# Altium PCB DataCollectionV1.0（18-7-31）.PcbDoc (part 2 of 2)
Units mm, origin at the board's own origin, x right, y up, seen from the top; angles counter-clockwise.
Board outline 100 x 91.53 mm, 4 copper layers (Top Layer, GND, VCC, Bottom Layer); 127 components, 107 nets, 701 pads, 38 vias.
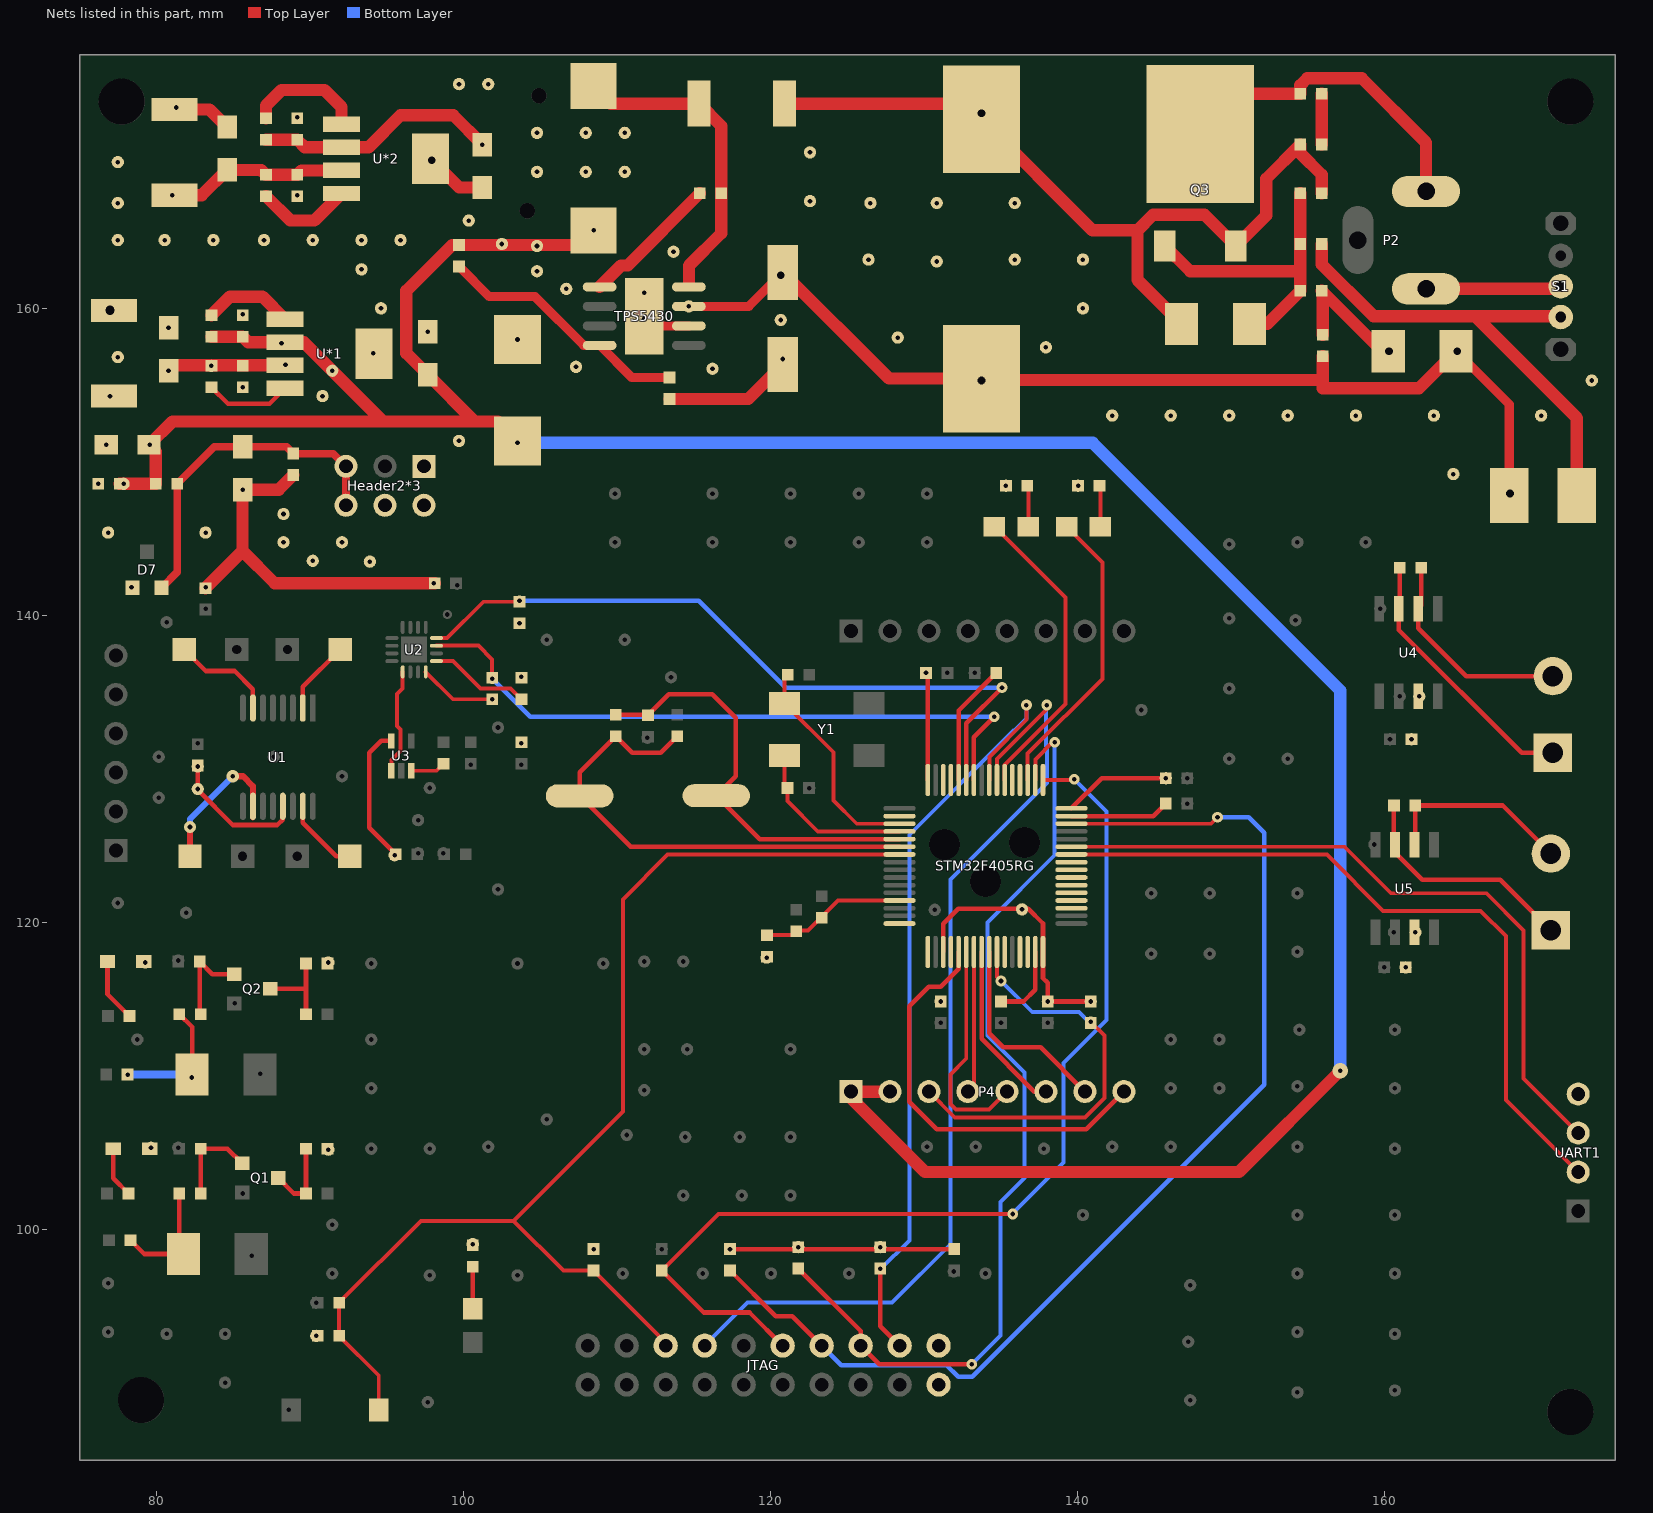
[diagram p4: the nets of this part, all layers, seen from the top]

## Via types
v1: diameter 0.7, hole 0.3, Top Layer to Bottom Layer, 23 vias
v2: diameter 0.8, hole 0.3, Top Layer to Bottom Layer, 13 vias
v3: diameter 1, hole 0.3, Top Layer to Bottom Layer, 2 vias

## Nets (pads, with @x,y where several pads share a name; then routed paths per layer and width w, separated by ;. In a path a pad name is that pad's centre, name@x,y a point inside that pad or via, vN(x,y) a via of type N, cw(c..) or ccw(c..) an arc to the next point about the centre after c; other vN are vias at no path point) (continued)
GND: C6.2 C8.2 C9.1 C10.2 C12.2 C13.2 C14.2 C15.2 C17.2 C18.2 C19.2 C20.2 C21.2 C22.2 C23.2 C24.2 C25.2 D5.1 D6.1 D7.1 D8.1 D9.1 D10.1 pad.2@76.2,148.59 pad.2@76.708,151.13 pad.2@76.835,145.415 pad.2@76.962,159.893 pad.2@77.47,156.845 pad.2@77.47,164.465 pad.2@77.47,166.878 pad.2@77.47,169.545 pad.2@78.359,141.859 pad.2@80.518,164.465 pad.2@80.772,158.75 pad.2@81.28,173.101 pad.2@83.185,141.859 pad.2@83.185,145.415 pad.2@83.693,164.465 pad.2@85.598,148.209 pad.2@85.598,154.876 pad.2@85.598,159.639 pad.2@86.995,164.465 pad.2@88.265,144.78 pad.2@89.154,167.386 pad.2@89.154,172.466 pad.2@90.17,164.465 pad.2@90.805,154.305 pad.2@92.075,144.78 pad.2@93.345,162.56 pad.2@93.345,164.465 pad.2@94.107,157.099 pad.2@94.615,160.02 pad.2@95.885,164.465 pad.2@97.663,158.496 pad.2@97.917,169.672 pad.2@98.044,142.113 pad.2@99.695,151.384 pad.2@100.33,165.735 pad.2@103.505,157.988 pad.2@104.775,162.433 pad.2@106.68,161.29 pad.2@107.315,156.21 pad.2@111.76,159.385 pad.2@111.76,161.036 pad.2@113.665,163.703 pad.2@116.205,156.083 pad.2@120.65,159.258 pad.2@120.777,156.718 pad.2@122.555,167.005 pad.2@122.555,170.18 pad.2@126.365,163.195 pad.2@126.492,166.878 pad.2@128.27,158.115 pad.2@130.81,163.068 pad.2@130.81,166.878 pad.2@133.731,172.72 pad.2@135.89,163.195 pad.2@135.89,166.878 pad.2@137.922,157.48 pad.2@140.335,160.02 pad.2@140.335,163.195 pad.2@142.24,153.035 pad.2@146.05,153.035 pad.2@149.86,153.035 pad.2@153.67,153.035 pad.2@158.115,153.035 pad.2@160.274,157.226 pad.2@163.195,153.035 pad.2@164.465,149.225 pad.2@170.18,153.035 pad.2@173.482,155.321 Q3.2 R3.1 R24.2 R26.1 R28.1 R39.1 TPS5430.6 TPS5430.9 U*1.5 U*2.5 | length 105.3
  Top Layer w0.6: TPS5430.9@112.395,158.877 TPS5430.6@114.668,158.877
  Top Layer w0.8: D9.1@81.153,172.974 83.439,172.974 C23.2@84.582,171.831 ; R3.1@83.185,141.796 85.598,144.208 ; C14.2@88.9,149.161 87.947,148.209 C12.2@85.598,148.209 85.598,144.208 ; U*2.5@97.844,169.755 99.705,167.894 C22.2@101.219,167.894 ; R39.1@98.108,142.113 87.694,142.113 85.598,144.208 ; R28.1@113.411,154.114 118.538,154.114 C8.2@120.786,156.362 ; D8.1@120.904,173.355 132.706,173.355 C6.2@133.722,172.339 140.961,165.1 143.891,165.1 ; D6.1@146.761,159.004 143.891,161.874 143.891,165.1 ; C10.2@155.892,161.163 C10.2@155.956,161.1 ; R24.2@155.892,167.513 155.892,168.719 154.495,170.117 R26.1@154.495,170.688 152.273,168.465 152.273,166.065 Q3.2@150.292,164.084 148.26,166.116 144.907,166.116 143.891,165.1 ; C9.1@155.956,158.305 C10.2@155.956,161.1 ; D5.1@160.223,157.226 159.83,157.226 C10.2@155.956,161.1
JTCK: JTAG.9 R43.1 STM32F405RG.49 | length 68.2
  Top Layer w0.256: R43.1@112.903,97.346 116.586,101.028 v1(135.763,101.028) ; STM32F405RG.49@137.735,129.298 v1@139.839,129.298
  Top Layer w0.3: R43.1@112.903,97.346 115.633,94.615 118.618,94.615 JTAG.9@120.777,92.456
  Bottom Layer w0.256: v1@135.636,100.965 139.065,104.394 139.065,110.871 141.859,113.665 141.859,127.254 v1(139.763,129.35)
JTDI: JTAG.5 R36.2 STM32F405RG.50 | length 62.2
  Top Layer w0.256: STM32F405RG.50@137.235,129.298 137.235,130.631 v1@138.43,131.826
  Top Layer w0.3: R36.2@121.793,97.472 125.857,93.408 JTAG.5@125.857,92.456 127.063,91.249 v1(133.096,91.249)
  Bottom Layer w0.256: v1(133.096,91.249) 134.969,93.123 134.969,101.822 136.525,103.378 136.525,110.236 134.112,112.649 134.112,120.015 138.493,124.396 v1(138.493,131.762)
JTDO: JTAG.13 STM32F405RG.55 | length 62.7
  Top Layer w0.256: STM32F405RG.55@134.735,129.298 134.735,130.671 137.922,133.858 v1@137.922,134.175
  Bottom Layer w0.256: JTAG.13@115.697,92.456 118.491,95.25 127.889,95.25 131.699,99.06 131.699,122.809 137.986,129.095 137.986,131.453 137.915,131.523 137.915,134.105 v1(137.986,134.175)
JTMS: JTAG.7 R37.2 STM32F405RG.46 | length 75.1
  Top Layer w0.256: STM32F405RG.46@139.585,126.448 148.673,126.448 v1(149.098,126.873)
  Top Layer w0.3: R37.2@117.348,97.346 120.332,94.361 121.412,94.361 JTAG.7@123.317,92.456
  Bottom Layer w0.3: JTAG.7@123.317,92.456 124.587,91.186 131.445,91.186 132.207,90.424 133.119,90.424 152.146,109.451 152.146,125.857 151.13,126.873 v1(149.098,126.873)
JTRST: JTAG.3 R34.2 STM32F405RG.56 | length 52.2
  Top Layer w0.256: STM32F405RG.56@134.235,129.298 134.235,130.806 136.652,133.223 v1(136.652,134.175)
  Top Layer w0.3: v1(127.127,97.472) 127.127,93.726 JTAG.3@128.397,92.456
  Bottom Layer w0.256: v1@127.127,97.409 129.032,99.314 129.032,125.73 135.82,132.518 135.875,132.518 136.652,133.295 v1(136.652,134.175)
MUXOUT: U2.13 U3.1 | length 6.9
  Top Layer w0.256: U3.1@95.29,129.902 95.29,130.596 95.885,131.191 95.885,132.588 95.656,132.817 95.656,134.894 96.024,135.262 U2.13@96.024,136.345
NetC10_1: C10.1 D6.2 Q3.1 R23.1 R24.1 | length 20.1
  Top Layer w0.8: Q3.1@145.669,164.084 147.32,162.433 154.495,162.433 ; D6.2@151.181,159.004 152.336,159.004 C10.1@154.495,161.163 154.495,162.433 ; R24.1@154.495,167.513 R23.1@154.495,164.211 154.495,162.433
NetC11_1: C11.1 R26.2 | length 3.3
  Top Layer w0.8: R26.2@155.892,170.688 C11.1@155.892,173.99
NetC11_2: C11.2 P2.2 Q3.3 | length 17.8
  Top Layer w0.8: Q3.3@150.575,173.99 C11.2@154.495,173.99 154.495,174.556 154.946,175.006 158.496,175.006 162.687,170.815 P2.2@162.687,167.64
NetC16_1: C16.1 TPS5430.1 | length 9.1
  Top Layer w0.8: TPS5430.1@108.852,161.417 110.249,162.814 110.68,162.814 C16.1@115.379,167.513
NetC16_2: C16.2 D8.2 L1.1 TPS5430.8 | length 20.6
  Top Layer w0.8: L1.1@108.458,174.498 109.601,173.355 D8.2@115.316,173.355 116.776,171.894 C16.2@116.776,167.513 116.776,164.909 114.668,162.801 TPS5430.8@114.668,161.544
NetC37_1: C37.1 STM32F405RG.47 | length 6.5
  Top Layer w0.3: STM32F405RG.47@139.585,126.948 144.919,126.948 C37.1@145.732,127.762
NetC38_2: C38.2 STM32F405RG.31 | length 5
  Top Layer w0.3: C38.2@135.001,114.871 136.462,114.871 137.235,115.645 STM32F405RG.31@137.235,118.098
NetCAN1_1: CAN1.1 R47.1 U4.7 | length 17.4
  Top Layer w0.3: R47.1@160.972,143.129 160.972,140.51 U4.7@160.909,140.447 160.909,139.065 168.91,131.064 CAN1.1@170.942,131.064
NetCAN1_2: CAN1.2 R47.2 U4.6 | length 14.1
  Top Layer w0.3: R47.2@162.369,143.129 162.369,140.637 U4.6@162.179,140.447 162.179,139.192 165.307,136.064 CAN1.2@170.942,136.064
NetCAN2_1: CAN2.1 R49.1 U5.7 | length 15.3
  Top Layer w0.3: R49.1@160.591,127.635 160.591,125.143 U5.7@160.655,125.08 160.655,124.587 162.433,122.809 167.513,122.809 CAN2.1@170.815,119.507
NetCAN2_2: CAN2.2 R49.2 U5.6 | length 12.7
  Top Layer w0.3: U5.6@161.925,125.08 161.988,125.143 R49.2@161.988,127.635 167.687,127.635 CAN2.2@170.815,124.507
NetD1_1: D1.1 R5.2 | length 3.3
  Top Layer w0.3: D1.1@77.179,105.283 77.179,103.352 R5.2@78.168,102.362
NetD2_2: D2.2 R9.2 R10.1 | length 7.9
  Top Layer w0.3: R9.2@78.295,99.314 79.184,98.425 D2.2@81.737,98.425 81.471,98.692 R10.1@81.471,102.362
NetD3_1: D3.1 R15.2 | length 4.1
  Top Layer w0.3: D3.1@76.798,117.475 76.798,115.353 R15.2@78.232,113.919
NetD4_2: D4.2 pad.1@82.296,109.918 R19.2 R20.1 | length 8.5
  Top Layer w0.3: R20.1@81.471,114.046 82.309,113.208 D4.2@82.309,110.109
  Bottom Layer w0.5: v2(78.105,110.109) pad.1@82.308,110.109
NetDS1_1: DS1.1 R33.1 | length 2.7
  Top Layer w0.256: R33.1@141.415,148.463 141.477,148.4 DS1.1@141.477,145.798
NetDS2_1: DS2.1 R40.1 | length 2.7
  Top Layer w0.256: R40.1@136.715,148.463 136.778,148.4 DS2.1@136.778,145.798
NetP2_1: P2.1 S1.2 | length 8.8
  Top Layer w0.8: P2.1@162.687,161.29 171.287,161.29 S1.2@171.45,161.453
NetP3_1: P3.1 R23.2 S1.1 | length 33
  Top Layer w0.8: R23.2@155.892,164.211 155.892,162.877 159.258,159.512 165.862,159.512 172.507,152.867 P3.1@172.507,147.828 ; 165.608,159.512 171.391,159.512 S1.1@171.45,159.453
NetPower_1: Power.1 R42.1 | length 2.7
  Top Layer w0.3: Power.1@100.582,94.868 100.582,97.598 R42.1@100.584,97.599
NetQ1_1: Q1.1 R10.2 R11.2 | length 6
  Top Layer w0.3: R10.2@82.867,102.362 R11.2@82.867,105.283 84.611,105.283 Q1.1@85.566,104.328
NetQ1_3: Q1.3 R4.1 R8.2 | length 5.2
  Top Layer w0.3: Q1.3@87.916,103.378 88.932,102.362 R8.2@89.725,102.362 R4.1@89.725,105.283
NetQ2_1: Q2.1 R20.2 R21.2 | length 6.1
  Top Layer w0.3: R20.2@82.867,114.046 82.804,114.109 R21.2@82.804,117.475 83.632,116.647 Q2.1@85.058,116.647
NetQ2_3: Q2.3 R16.1 R17.2 | length 5.6
  Top Layer w0.3: Q2.3@87.408,115.697 89.725,115.697 ; R17.2@89.725,114.046 89.725,115.697 ; R16.1@89.725,117.348 89.725,115.697
NetR1_1: R1.1 U1.2 | length 4.8
  Top Layer w0.3: U1.2@89.52,133.985 89.52,135.367 R1.1@91.948,137.795
NetR2_2: R2.2 U1.15 | length 5
  Top Layer w0.3: U1.15@89.52,127.585 89.52,126.507 91.694,124.333 R2.2@92.583,124.333
NetR6_1: R6.1 U1.7 | length 6.8
  Top Layer w0.3: R6.1@81.788,137.795 83.185,136.398 85.09,136.398 86.27,135.218 U1.7@86.27,133.985
NetR7_2: R7.2 U1.10 | length 10
  Top Layer w0.3: U1.10@86.27,126.802 U1.10@86.27,127.585
  Top Layer w0.4: R7.2@82.169,124.333 v2(82.169,126.238) ; v2(84.963,129.54) 85.635,129.54 86.27,128.905 U1.10@86.27,127.585
  Bottom Layer w0.4: v2(82.169,126.238) 82.169,126.746 v2(84.963,129.54)
NetR12_2: R12.2 U2.1 | length 6.6
  Top Layer w0.256: U2.1@98.224,137.045 99.314,137.045 101.104,135.255 103.06,135.255 R12.2@103.759,134.556
NetR22_2: R22.2 U3.3 | length 2.3
  Top Layer w0.256: U3.3@96.59,129.902 98.215,129.902 R22.2@98.679,130.365
NetR27_1: R27.1 R28.2 TPS5430.4 | length 16.7
  Top Layer w0.6: R27.1@99.695,162.75 101.663,160.782 104.648,160.782 107.823,157.607 TPS5430.4@108.852,157.607 110.947,155.511 R28.2@113.411,155.511
NetR29_1: R29.1 U*1.1 | length 5.9
  Top Layer w0.8: R29.1@83.566,159.576 84.772,160.782 86.884,160.782 U*1.1@88.361,159.305
NetR30_1: R30.1 U*1.4 | length 5.7
  Top Layer w0.3: R30.1@83.566,154.876 84.645,153.797 87.353,153.797 U*1.4@88.361,154.805
NetR31_1: R31.1 U*2.1 | length 7.8
  Top Layer w0.8: R31.1@87.122,172.403 87.122,173.228 88.138,174.244 90.932,174.244 92.044,173.132 U*2.1@92.044,172.005
NetR32_1: R32.1 U*2.4 | length 6.3
  Top Layer w0.8: R32.1@87.122,167.322 88.709,165.735 90.274,165.735 U*2.4@92.044,167.505
NetR38_1: R38.1 STM32F405RG.60 | length 8
  Top Layer w0.3: STM32F405RG.60@132.235,129.298 132.235,133.823 R38.1@134.683,136.271
PA2: STM32F405RG.16
PA3: STM32F405RG.17
PA4: STM32F405RG.20
PA8: STM32F405RG.41
PB1: STM32F405RG.27
PB8: STM32F405RG.61
PB9: STM32F405RG.62
PB10: STM32F405RG.29
PB11: STM32F405RG.30
PB14: STM32F405RG.35
PB15: STM32F405RG.36
PC6: STM32F405RG.37
PC7: STM32F405RG.38
PC8: STM32F405RG.39
PC9: STM32F405RG.40
PC10: DS1.2 STM32F405RG.51 | length 19.5
  Top Layer w0.256: STM32F405RG.51@136.735,129.298 136.735,131.02 141.605,135.89 141.605,143.46 DS1.2@139.267,145.798
PC11: STM32F405RG.52
PC12: STM32F405RG.53
PC13: STM32F405RG.2
PC14: C29.2 STM32F405RG.3 Y1.4 | length 14.5
  Top Layer w0.256: C29.2@121.102,136.144 120.898,135.94 Y1.4@120.898,134.288 124.079,131.107 124.079,127.972 125.603,126.448 STM32F405RG.3@128.385,126.448
PC15: C30.2 STM32F405RG.4 Y1.1 | length 11.2
  Top Layer w0.256: Y1.1@120.898,130.888 120.898,128.974 C30.2@121.094,128.778 121.094,127.917 123.063,125.948 STM32F405RG.4@128.385,125.948
PD2: DS2.2 STM32F405RG.54 | length 20.1
  Top Layer w0.256: DS2.2@134.568,145.798 139.192,141.174 139.192,134.239 135.235,130.282 STM32F405RG.54@135.235,129.298
PH0: C31.2 R44.1 STM32F405RG.5 Y2.1 | length 27.7
  Top Layer w0.3: R44.1@109.9,133.541 111.972,133.541 C31.2@112,133.513 113.361,134.874 116.2,134.874 117.729,133.345 117.729,129.553 Y2.1@116.45,128.274 119.276,125.448 STM32F405RG.5@128.385,125.448
PH1: C32.2 R44.2 STM32F405RG.6 Y2.2 | length 32
  Top Layer w0.3: C32.2@113.919,132.143 112.84,131.064 110.98,131.064 R44.2@109.9,132.143 107.55,129.793 Y2.2@107.55,128.266 110.868,124.948 STM32F405RG.6@128.385,124.948
RESET: C27.1 JTAG.15 R35.1 R41.2 RESET.1 STM32F405RG.7 | length 78.1
  Top Layer w0.256: RESET.1@94.467,88.265 94.467,90.509 R35.1@91.885,93.091 C27.1@91.885,95.25 97.218,100.584 103.251,100.584 ; JTAG.15@113.157,92.647 R41.2@108.458,97.346 106.489,97.346 103.251,100.584 ; STM32F405RG.7@128.385,124.448 113.284,124.448 110.363,121.527 110.363,107.696 103.251,100.584
  Top Layer w0.8: JTAG.15@113.157,92.456 JTAG.15@113.157,92.647
RESET_N: P4.3 R48.1 STM32F405RG.26 | length 27
  Top Layer w0.256: P4.3@130.302,109 131.987,107.315 140.462,107.315 141.732,108.585 141.732,112.649 v1(140.843,113.538) ; STM32F405RG.26@134.735,118.098 134.735,116.459 v1@134.989,116.205
  Bottom Layer w0.256: v1(135.001,116.205) 137.033,114.173 140.081,114.173 v1@140.843,113.411
RX: STM32F405RG.43 UART1.3 | length 46.4
  Top Layer w0.256: STM32F405RG.43@139.585,124.948 157.373,124.948 160.401,121.92 166.624,121.92 169.037,119.507 169.037,109.855 UART1.3@172.593,106.299
SCL: R13.2 STM32F405RG.58 U2.3 | length 43.6
  Top Layer w0.256: U2.3@98.224,138.045 100.969,138.045 101.854,137.16 R13.2@101.854,135.953
  Top Layer w0.3: STM32F405RG.58@133.235,129.298 133.235,132.092 v1(134.556,133.413)
  Bottom Layer w0.3: v1(101.854,135.89) 104.331,133.413 v1(134.556,133.413)
SDA: R14.1 STM32F405RG.59 U2.4 | length 47.1
  Top Layer w0.256: U2.4@98.224,138.545 98.921,138.545 101.282,140.906 R14.1@103.632,140.906
  Top Layer w0.3: STM32F405RG.59@132.735,129.298 132.735,132.989 v1(135.064,135.319)
  Bottom Layer w0.3: v1(103.632,140.97) 115.316,140.97 120.968,135.319 v1(135.064,135.319)
SPI_CLK: P4.8 STM32F405RG.21 | length 27.3
  Top Layer w0.3: STM32F405RG.21@132.235,118.098 132.235,116.995 131.064,115.824 130.302,115.824 129.032,114.554 129.032,108.331 130.81,106.553 140.555,106.553 P4.8@143.002,109
SPI_CS: P4.7 STM32F405RG.25 | length 13.1
  Top Layer w0.3: STM32F405RG.25@134.235,118.098 134.235,112.803 135.151,111.887 137.575,111.887 P4.7@140.462,109
SPI_INTR: P4.6 STM32F405RG.24 | length 11.3
  Top Layer w0.3: STM32F405RG.24@133.735,118.098 133.735,112.435 137.17,109 P4.6@137.922,109
SPI_MISO: P4.5 STM32F405RG.22 | length 14.7
  Top Layer w0.256: STM32F405RG.22@132.735,118.098 132.735,111.145 131.699,110.109 131.699,108.204 132.08,107.823 134.205,107.823 P4.5@135.382,109
SPI_MOSI: P4.4 STM32F405RG.23 | length 9.3
  Top Layer w0.254: P4.4@132.842,109 133.235,109.393 STM32F405RG.23@133.235,118.098
TX: STM32F405RG.42 UART1.2 | length 47.8
  Top Layer w0.256: STM32F405RG.42@139.585,124.448 156.222,124.448 159.893,120.777 166.243,120.777 167.894,119.126 167.894,108.458 UART1.2@172.593,103.759
VCC3V3: C3.1 C23.1 C25.1 C26.1 C28.2 C35.1 C36.1 C39.2 C40.2 C41.2 D1.2 D3.2 D9.2 JTAG.1 JTAG.2 pad.1@79.248,117.411 pad.1@79.629,105.346 pad.1@91.186,105.219 pad.1@91.186,117.411 pad.1@108.458,98.742 pad.1@117.348,98.742 pad.1@121.793,98.87 pad.1@127.127,98.87 pad.2@81.026,167.386 pad.2@101.854,134.556 pad.2@103.632,139.51 pad.2@103.759,131.699 pad.2@103.759,136.017 pad.5@90.392,93.091 pad.5@119.729,117.729 pad.6@130.112,136.271 pad.6@135.319,148.463 pad.6@140.017,148.463 pad.6@145.732,129.413 pad.6@161.353,117.094 pad.6@161.734,131.953 pad.6@161.988,119.38 pad.6@162.243,134.747 pad.8@131.064,114.871 pad.8@136.368,120.87 pad.8@138.049,114.871 pad.8@140.843,114.871 R4.2 R12.1 R13.1 R14.2 R16.2 R32.2 R33.2 R34.1 R35.2 R36.1 R37.1 R40.2 R41.1 R42.2 R45.1 R48.2 STM32F405RG.19 STM32F405RG.32 STM32F405RG.48 STM32F405RG.64 U2.16 U4.3 U5.3 U*2.3 UART1.4 | length 62.7
  Top Layer w0.256: U2.16@97.524,136.345 99.312,134.556 R13.1@101.854,134.556
  Top Layer w0.3: R37.1@117.348,98.742 C26.1@131.953,98.742 ; C28.2@130.112,136.271 130.235,136.148 STM32F405RG.64@130.235,129.298 ; STM32F405RG.19@131.235,118.098 131.235,119.932 132.207,120.904 136.779,120.904 137.735,119.948 STM32F405RG.32@137.735,118.098 137.735,116.392 138.049,116.078 C39.2@138.049,114.871 R48.2@140.843,114.871 ; STM32F405RG.48@139.585,127.448 141.55,129.413 C35.1@145.732,129.413
  Top Layer w0.8: pad.2@81.026,167.386 D9.2@81.153,167.386 82.931,167.386 C23.1@84.582,169.037 86.804,169.037 R32.2@87.122,168.719 C25.1@89.154,168.719 89.44,169.005 U*2.3@92.044,169.005
  other v2: 100.584,99.06
VCC5V: C4.2 C19.1 C21.1 D10.2 Header2*3.1 Header2*3.2 pad.1@95.504,124.396 pad.2@76.962,154.305 pad.2@80.772,155.956 pad.2@83.566,156.273 pad.2@88.392,156.337 R30.2 U3.5 U*1.3 | length 16.8
  Top Layer w0.254: C19.1@80.772,155.956 C19.1@81.121,156.305
  Top Layer w0.3: U3.5@95.29,131.842 94.631,131.842 93.853,131.064 93.853,126.174 C4.2@95.567,124.46
  Top Layer w0.8: C19.1@81.121,156.305 U*1.3@88.361,156.305
VCC7V: C13.1 C15.1 C17.1 C18.1 C20.1 C22.1 C24.1 L1.2 P4.1 P4.2 pad.2@99.695,174.625 pad.2@101.6,174.625 pad.2@101.219,170.688 pad.2@102.489,164.211 pad.2@104.775,164.084 pad.2@104.775,168.91 pad.2@104.775,171.45 pad.2@107.95,168.91 pad.2@107.95,171.45 pad.2@108.458,165.1 pad.2@110.49,168.91 pad.2@110.49,171.45 pad.3 R25.2 R27.2 R29.2 R31.2 U*1.2 U*2.2 | length 208.6
  Top Layer w0.8: C15.1@77.597,148.59 R25.2@79.947,148.59 79.947,150.685 C13.1@79.502,151.13 81.026,152.654 94.742,152.654 ; R29.2@83.566,158.178 C20.1@85.598,158.178 85.971,157.805 U*1.2@88.361,157.805 89.591,157.805 94.742,152.654 ; R31.2@87.122,171.005 C24.1@89.154,171.005 89.654,170.505 U*2.2@92.044,170.505 93.797,170.505 95.885,172.593 99.314,172.593 C22.1@101.219,170.688 ; C17.1@103.505,151.384 102.235,152.654 100.711,152.654 ; L1.2@108.458,165.1 107.505,164.147 R27.2@99.695,164.147 99.251,164.147 96.266,161.163 96.266,157.099 C18.1@97.663,155.702 100.711,152.654 ; P4.2@127.762,109 P4.1@125.222,109 125.222,108.585 130.048,103.759 150.495,103.759 v3(157.099,110.363) ; 94.742,152.654 100.711,152.654
  Bottom Layer w0.8: v3@103.378,151.257 140.97,151.257 157.099,135.128 v3(157.099,110.363)
  other v3: 103.505,151.257
VCC24V: C6.1 C8.1 C9.2 D5.2 P3.2 pad.0@114.668,160.147 pad.0@120.65,162.179 pad.2@133.731,155.321 pad.2@164.719,157.226 pad.2@168.148,147.955 TPS5430.7 | length 67.8
  Top Layer w0.6: TPS5430.7@114.707,160.108 TPS5430.7@114.668,160.147 118.571,160.147 C8.1@120.786,162.362 ; D5.2@164.643,157.226 168.107,153.762 P3.2@168.107,147.828
  Top Layer w0.8: C8.1@120.786,162.362 127.7,155.448 C6.1@133.722,155.448 133.816,155.354 155.956,155.354 ; C9.2@155.956,156.909 155.956,154.813 162.23,154.813 D5.2@164.643,157.226
VDD_ADG711: C1.2 Header2*3.4 pad.1@82.677,128.714 pad.1@82.677,130.175 pad.1@88.265,146.621 pad.1@90.17,143.573 pad.1@93.888,143.52 U1.13 | length 9.1
  Top Layer w0.3: C1.2@82.677,130.238 82.677,128.651 84.963,126.365 87.865,126.365 88.22,126.72 U1.13@88.22,127.585
VDDA: C33.1 C34.1 R45.2 STM32F405RG.13 | length 9.6
  Top Layer w0.256: R45.2@119.761,119.189 121.349,119.189 121.666,119.507 122.428,119.507 124.369,121.448 STM32F405RG.13@128.385,121.448
VREF5V: C12.1 C14.1 D7.2 Header2*3.5 Header2*3.6 R25.1 | length 22.2
  Top Layer w0.5: D7.2@80.325,141.827 81.343,142.845 R25.1@81.343,148.59 83.757,151.003 C12.1@85.598,151.003 88.456,151.003 C14.1@88.9,150.558 91.504,150.558 Header2*3.5@92.329,149.733 Header2*3.6@92.329,147.193
pads on no net: D7.3 JTAG.11 JTAG.17 JTAG.19 P1.3 P1.4 P1.5 P1.6 P1.7 P1.8 P2.3 S1.3 S1.4 S1.5 STM32F405RG.1 TPS5430.2 TPS5430.3 TPS5430.5 U1.4 U1.12 U2.7 U2.17 U4.5 U5.5 Y1.2 Y1.3

## Polygon pours and split planes (outlines as drawn)
GND on Bottom Layer "Top Overlay-No Net" (hatched 90Degree grid 0.7 track 0.3, remove dead copper, pour order 41): 71.12,153.797 73.533,151.384 100.345,151.384 100.345,140.52 98.425,138.6 97.366,137.541 66.167,137.541
DGND on Bottom Layer "Top Overlay-No Net" (hatched 90Degree grid 0.7 track 0.3, remove dead copper, pour order 39): 68.453,141.351 98.171,141.351 99.06,140.462 98.806,140.716 98.806,148.209 173.736,148.209 176.657,145.288 178.689,143.256 178.689,79.502 59.182,79.502 56.515,82.169
GND on Bottom Layer "Top Overlay-No Net" (hatched 90Degree grid 0.7 track 0.3, remove dead copper, pour order 37): 75.057,163.703 143.383,163.703 164.973,142.113 165.862,141.224 174.879,141.224 174.879,176.276 174.244,176.911 69.977,176.911
AGND on Bottom Layer "Top Overlay-No Net" (hatched 90Degree grid 0.7 track 0.3, remove dead copper, pour order 35): 75,140.589 75.127,140.716 96.6,140.716 96.6,138.074 96.774,137.9 96.774,137.686 97.3,137.16 97.3,135.89 97.3,135.745 102.108,130.937 102.108,124.079 100.076,122.047 81.915,122.047 81.915,122.174 80.518,123.571 80.518,126.238 77.978,128.778 75.184,128.778
VCC7V on Bottom Layer "Top Overlay-No Net" (hatched 90Degree grid 0.7 track 0.3, remove dead copper, pour order 33): 74.93,166.243 141.351,166.243 167.132,140.462 168.021,139.573 168.021,93.853 120.523,93.853 119.253,95.123 120.904,96.774 120.904,144.399 103.632,144.399 100.203,147.828 100.076,147.955 100.076,151.257 75.565,151.257 74.803,152.019
AVDD_ADC on Bottom Layer "Top Overlay-No Net" (hatched 90Degree grid 0.7 track 0.3, remove dead copper, pour order 23): 91.059,151.003 91.059,145.923 93.853,145.923 93.98,145.796 93.98,134.747 93.98,134.493 96.901,131.572 101.473,131.572 101.473,134.62 99.187,136.906 98.679,137.414 98.679,151.003 91.059,151.003 90.932,151.13
GND on Top Layer "Top Overlay-No Net" (hatched 90Degree grid 0.7 track 0.3, remove dead copper, pour order 29): 75,141.732 98.298,141.732 98.298,150.495 160.02,150.495 167.767,142.748 167.767,142.621 175.006,142.621 175.133,142.748 174.879,143.002 174.879,176.657 74.803,176.657
VCC24V on Top Layer "Top Overlay-No Net" (hatched 90Degree grid 0.7 track 0.3, remove dead copper, pour order 30): 110.998,165.608 110.998,152.273 111.252,152.019 162.179,152.019 162.179,147.828 165.862,144.145 169.909,144.145 170.173,144.41 170.879,145.115 170.879,145.333 170.879,154.737 170.933,154.792 167.005,158.72 167.005,159.004 128.524,159.004 128.27,159.258 123.063,164.465 123.063,165.354
NetC11_2 on Top Layer "Top Overlay-No Net" (hatched 90Degree grid 0.7 track 0.3, remove dead copper, pour order 25): 143.5,175.895 143.51,175.89 143.51,170.307 168.529,170.307 168.7,170.396 168.7,175.829
NetP2_1 on Top Layer "Top Overlay-No Net" (hatched 90Degree grid 0.7 track 0.3, remove dead copper, pour order 22): 158.242,164.465 174.244,164.465 174.371,164.338 174.371,159.131 158.369,159.131 158.115,159.385
DGND on Top Layer "Top Overlay-No Net" (hatched 90Degree grid 0.7 track 0.3, remove dead copper, pour order 31): 75,127.762 75.127,127.635 77.851,127.635 77.851,127.381 79.502,125.73 79.502,123.063 81.915,120.65 100.584,120.65 100.584,120.777 103.886,124.079 103.378,124.587 103.378,131.064 102.108,132.334 101.727,132.715 100.33,132.715 97.282,135.763 97.282,137.033 96.52,137.795 96.52,140.716 98.679,140.716 98.806,140.843 98.806,149.86 159.512,149.86 167.386,141.986 175,141.986 175,85.211 174.752,84.963 75.057,84.963
AGND on Top Layer "Top Overlay-No Net" (hatched 90Degree grid 0.7 track 0.3, remove dead copper, pour order 27): 75,140.716 96.52,140.716 96.52,137.795 96.52,137.668 97.282,136.906 97.282,135.763 102.108,130.937 102.108,124.206 102.108,124.079 100.076,122.047 81.915,122.047 81.915,122.174 80.518,123.571 80.518,126.238 78.105,128.651 75.311,128.651
GND on GND (split plane): 174.49,142.786 167.762,142.786 167.76,142.798 167.732,142.84 159.985,150.587 159.943,150.615 159.893,150.624 98.806,150.624 98.756,150.615 98.714,150.587 98.686,150.545 98.677,150.495 98.677,141.226 75.51,141.226 75.51,176.02 174.49,176.02
AGND on GND (split plane): 96.391,138.303 96.4,138.253 96.428,138.211 97.153,137.487 97.153,135.763 97.162,135.713 97.19,135.671 101.979,130.883 101.979,124.006 100.149,122.176 82.096,122.176 80.647,123.625 80.647,126.238 80.638,126.288 80.61,126.33 78.197,128.743 78.155,128.771 78.105,128.78 75.51,128.78 75.51,140.968 96.391,140.968
DGND on GND (split plane): 167.457,142.748 167.429,142.706 167.419,142.656 167.429,142.607 167.457,142.565 167.499,142.537 167.548,142.527 174.49,142.527 174.49,85.51 75.51,85.51 75.51,128.522 78.051,128.522 80.389,126.184 80.389,123.571 80.398,123.521 80.426,123.479 81.95,121.955 81.992,121.927 82.042,121.918 100.203,121.918 100.253,121.927 100.295,121.955 102.2,123.86 102.228,123.902 102.237,123.952 102.237,130.937 102.228,130.987 102.2,131.029 97.411,135.817 97.411,137.541 97.402,137.591 97.374,137.633 96.649,138.357 96.649,140.968 98.806,140.968 98.856,140.977 98.898,141.005 98.926,141.047 98.935,141.097 98.935,150.366 159.839,150.366
VCC24V on VCC (split plane): 174.49,143.25 167.848,143.25 159.994,151.104 159.918,151.167 159.831,151.213 159.737,151.242 159.639,151.251 128.732,151.251 124.942,155.041 124.866,155.104 124.779,155.15 124.685,155.179 124.587,155.188 115.443,155.188 115.401,155.184 112.643,157.942 112.643,176.02 174.49,176.02
VCC7V on VCC (split plane): 111.639,157.734 111.648,157.636 111.677,157.542 111.723,157.455 111.786,157.379 114.077,155.088 103.29,155.088 98.192,160.186 98.192,176.02 111.639,176.02
VDD_ADG711 on VCC (split plane): 93.724,148.59 93.733,148.54 93.761,148.498 93.803,148.47 93.853,148.461 95.629,148.461 95.629,145.936 94.591,140.748 94.396,140.554 94.368,140.512 94.359,140.462 94.359,130.048 94.359,124.387 92.148,122.176 82.096,122.176 80.647,123.625 80.647,126.238 80.638,126.288 80.61,126.33 79.403,127.536 79.377,127.562 79.377,144.218 81.88,146.72 81.908,146.762 81.917,146.812 81.917,152.906 93.724,152.906
VCC5V on VCC (split plane): 98.55,152.473 98.55,146.739 98.206,146.396 98.178,146.354 98.169,146.304 98.169,143.183 96.428,141.443 96.4,141.401 96.391,141.351 96.391,139.827 96.391,138.176 96.4,138.126 96.428,138.084 97.153,137.36 97.153,135.763 97.153,132.896 96.177,131.92 96.149,131.878 96.139,131.828 96.089,131.819 96.047,131.791 96.019,131.749 96.01,131.699 96.01,123.244 92.529,119.763 75.51,119.763 75.51,163.066 87.957,163.066
VCC3V3 on VCC (split plane): 97.388,160.02 97.396,159.942 97.419,159.866 97.456,159.797 97.506,159.736 102.84,154.402 102.901,154.352 102.97,154.315 103.046,154.292 103.124,154.284 114.891,154.284 114.91,154.268 114.997,154.222 115.091,154.193 115.189,154.184 115.287,154.193 115.316,154.202 115.345,154.193 115.443,154.184 124.379,154.184 128.169,150.394 128.245,150.331 128.332,150.285 128.426,150.256 128.524,150.247 159.431,150.247 167.285,142.393 167.361,142.33 167.448,142.284 167.542,142.255 167.64,142.246 174.49,142.246 174.49,85.51 75.51,85.51 75.51,119.505 92.583,119.505 92.633,119.514 92.675,119.542 96.231,123.098 96.259,123.14 96.268,123.19 96.268,131.699 96.318,131.709 96.36,131.737 97.374,132.75 97.402,132.792 97.411,132.842 97.411,135.763 97.411,137.414 97.402,137.464 97.374,137.506 96.649,138.23 96.649,139.827 96.649,141.297 98.39,143.037 98.418,143.079 98.427,143.129 98.427,146.25 98.771,146.593 98.799,146.635 98.808,146.685 98.808,152.527 98.799,152.577 98.771,152.619 88.103,163.287 88.061,163.315 88.011,163.324 75.51,163.324 75.51,176.02 97.388,176.02

## Keep-outs
Keep-Out Layer:
  lines w0.254: 75,88.83 75,172.663 cw(c78.74,172.72) 78.865,176.458 ; 75.002,88.898 ccw(c78.74,88.773) 78.797,85.033 ; 78.83,85 170.924,85 ; 78.867,176.53 171.577,176.53 ; 170.788,84.969 ccw(c170.924,89.043) 175,89.106 ; 171.387,176.583 cw(c171.196,172.847) 174.934,172.722 ; 175,89.043 175,173.107

## Other copper
VCC (plane layer: these items are gaps in the copper):
  lines w0.254: 75,119.634 92.583,119.634 96.139,123.19 96.139,131.699 ; 75,163.195 88.011,163.195 98.679,152.527 98.679,146.685 98.298,146.304 98.298,143.129 96.52,141.351 96.52,139.827 96.52,138.176 97.282,137.414 97.282,135.763 97.282,132.842 96.268,131.828 ; 79.311,127.444 79.248,127.508 ; 91.44,165.227 91.44,165.354 ; 115.189,154.686 115.443,154.686 ; 79.248,127.508 80.518,126.238 80.518,123.571 82.042,122.047 92.202,122.047 94.488,124.333 94.488,130.048 94.488,140.462 94.71,140.684 95.758,145.923 95.758,148.59 93.853,148.59 93.853,153.035 81.788,153.035 81.788,146.812 79.248,144.272 79.248,127.508
  lines w0.8: 97.79,176.53 97.79,160.02 103.124,154.686 115.443,154.686
  lines w1: 112.141,176.53 112.141,157.734 115.189,154.686 ; 115.443,154.686 124.587,154.686 128.524,150.749 159.639,150.749 167.64,142.748 174.935,142.748
GND (plane layer: these items are gaps in the copper):
  lines w0.254: 74.803,141.097 98.44,141.097 98.806,141.097 98.806,150.495 159.893,150.495 167.64,142.748 ; 75,128.651 78.105,128.651 80.518,126.238 80.518,123.571 82.042,122.047 100.203,122.047 102.108,123.952 102.108,130.937 97.282,135.763 97.282,137.541 96.52,138.303 96.52,141.097 ; 167.548,142.656 174.844,142.656 174.879,142.621

## Silkscreen, mask and mechanical layers (free items; w line width, h text height)
Top Overlay:
  lines w0.254: 76.327,153.416 76.327,153.035 77.216,153.035 ; 78.359,166.497 78.359,167.259 79.502,167.259 ; 104.013,149.352 104.013,148.336 104.267,148.082 108.331,148.082 108.331,149.733
  text "IN-" at 163.576,170.434 h1 r180
  text "3.3V" at 78.105,164.211 h2
  text "IN+" at 163.83,164.084 h1 r180
  text "VCC5V" at 77.216,152.654 h1
  text "ADC" at 93.726,151.384 h1
  text "7V" at 107.188,149.733 h2
  text "VCC5V" at 100.203,146.05 h1 r90
  text "Vref5V" at 90.805,145.796 h1 r90
  text "ADG" at 93.599,144.653 h1
  text "DGND" at 125.73,140.589 h1 r90
  text "DGND" at 128.27,140.589 h1 r90
  text "L" at 171.196,139.7 h1 r90
  text "CH4" at 80.137,136.398 h1 r90
  text "CH3" at 79.121,134.366 h1
  text "CH2" at 79.121,131.699 h1
  text "CH1" at 79.121,129.286 h1
  text "D2" at 79.121,126.619 h1
  text "D1" at 79.121,124.079 h1
  text "H" at 170.688,116.205 h1 r270
  text "VCC" at 170.434,107.95 h1 r90
  text "CS" at 140.97,105.664 h1 r90
  text "RX" at 170.434,105.537 h1 r90
  text "<7V" at 125.603,104.648 h1 r90
  text "<7V" at 128.397,104.521 h1 r90
  text "CLK" at 143.764,104.521 h1 r90
  text "MOSI" at 133.477,104.14 h1 r90
  text "MISO" at 136.144,103.886 h1 r90
  text "INTR" at 138.684,103.886 h1 r90
  text "RSTN" at 130.937,103.759 h1 r90
  text "TX" at 170.434,102.997 h1 r90
  text "GND" at 170.434,99.568 h1 r90
  text "6" at 150,88 h50
Bottom Overlay:
  text "6" at 150,88 h50